# Altium PCB PCB1.PcbDoc
Units mm, origin at the board's own origin, x right, y up, seen from the top; angles counter-clockwise.
Board outline 152.4 x 101.6 mm, 2 copper layers (Top Layer, Bottom Layer); 68 components, 41 nets, 225 pads, 440 vias.
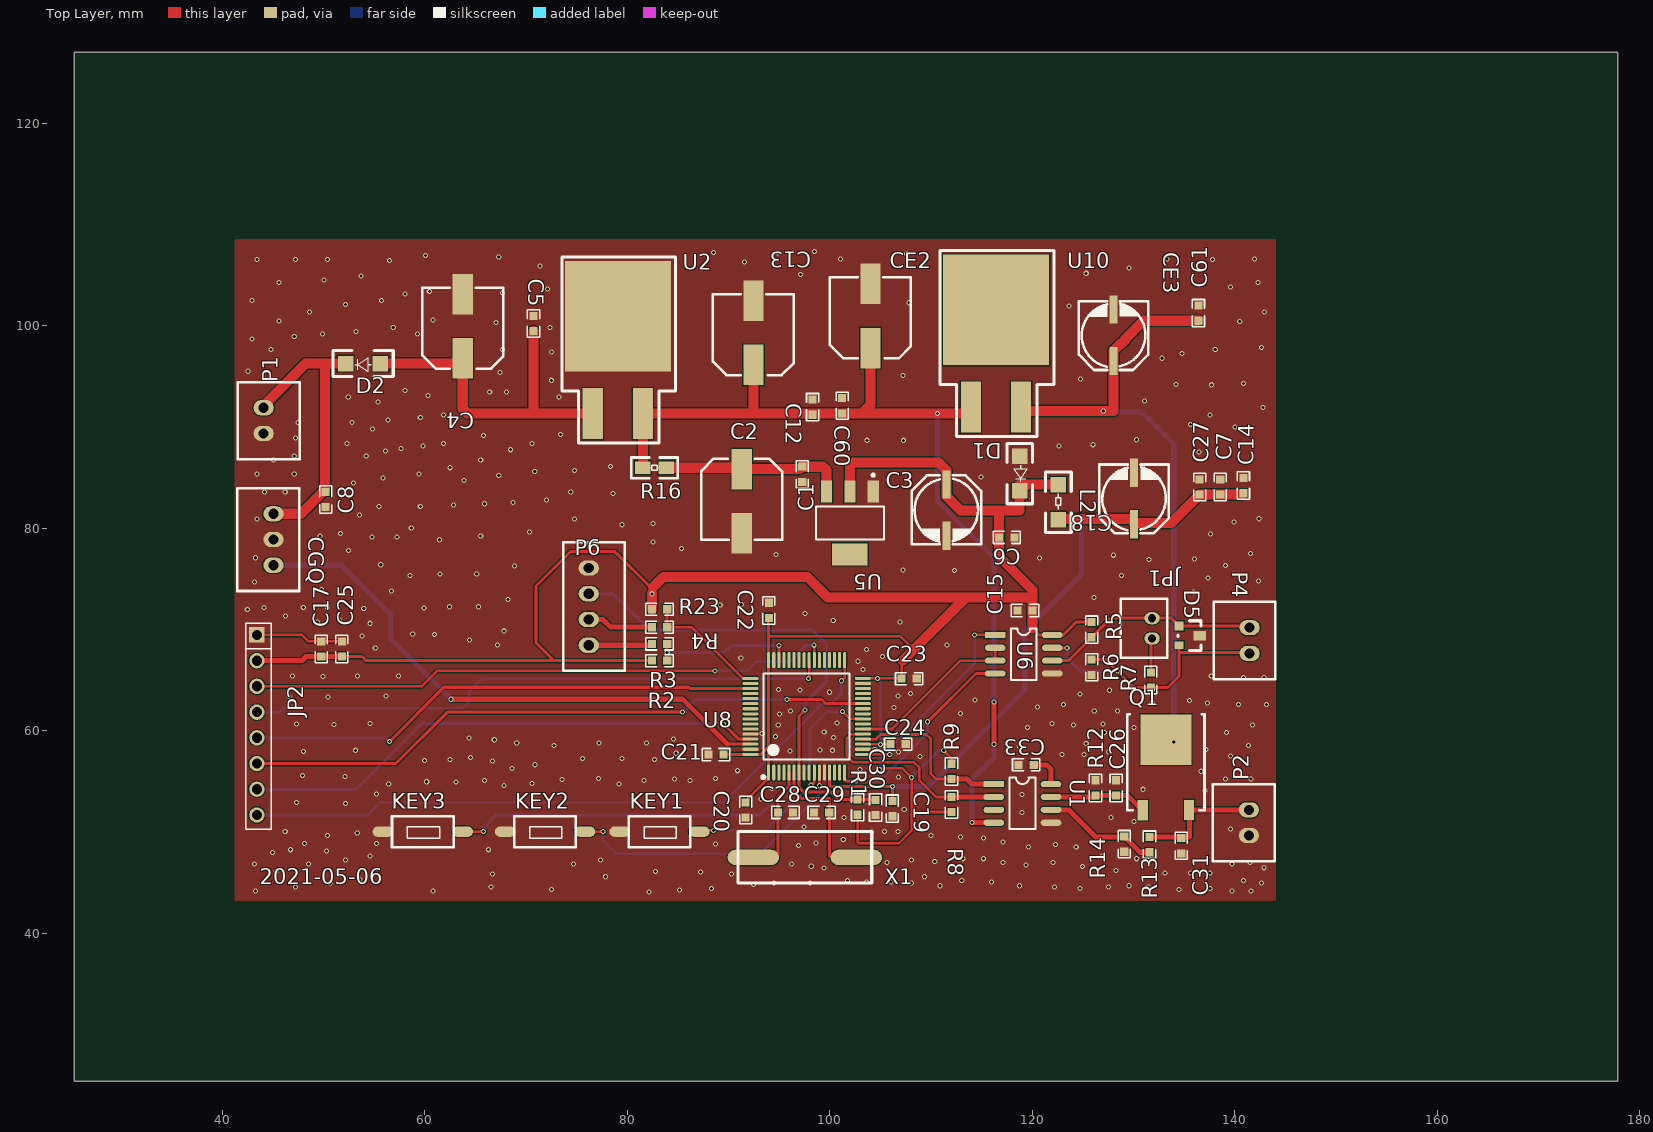
[diagram p0: Top Layer view]
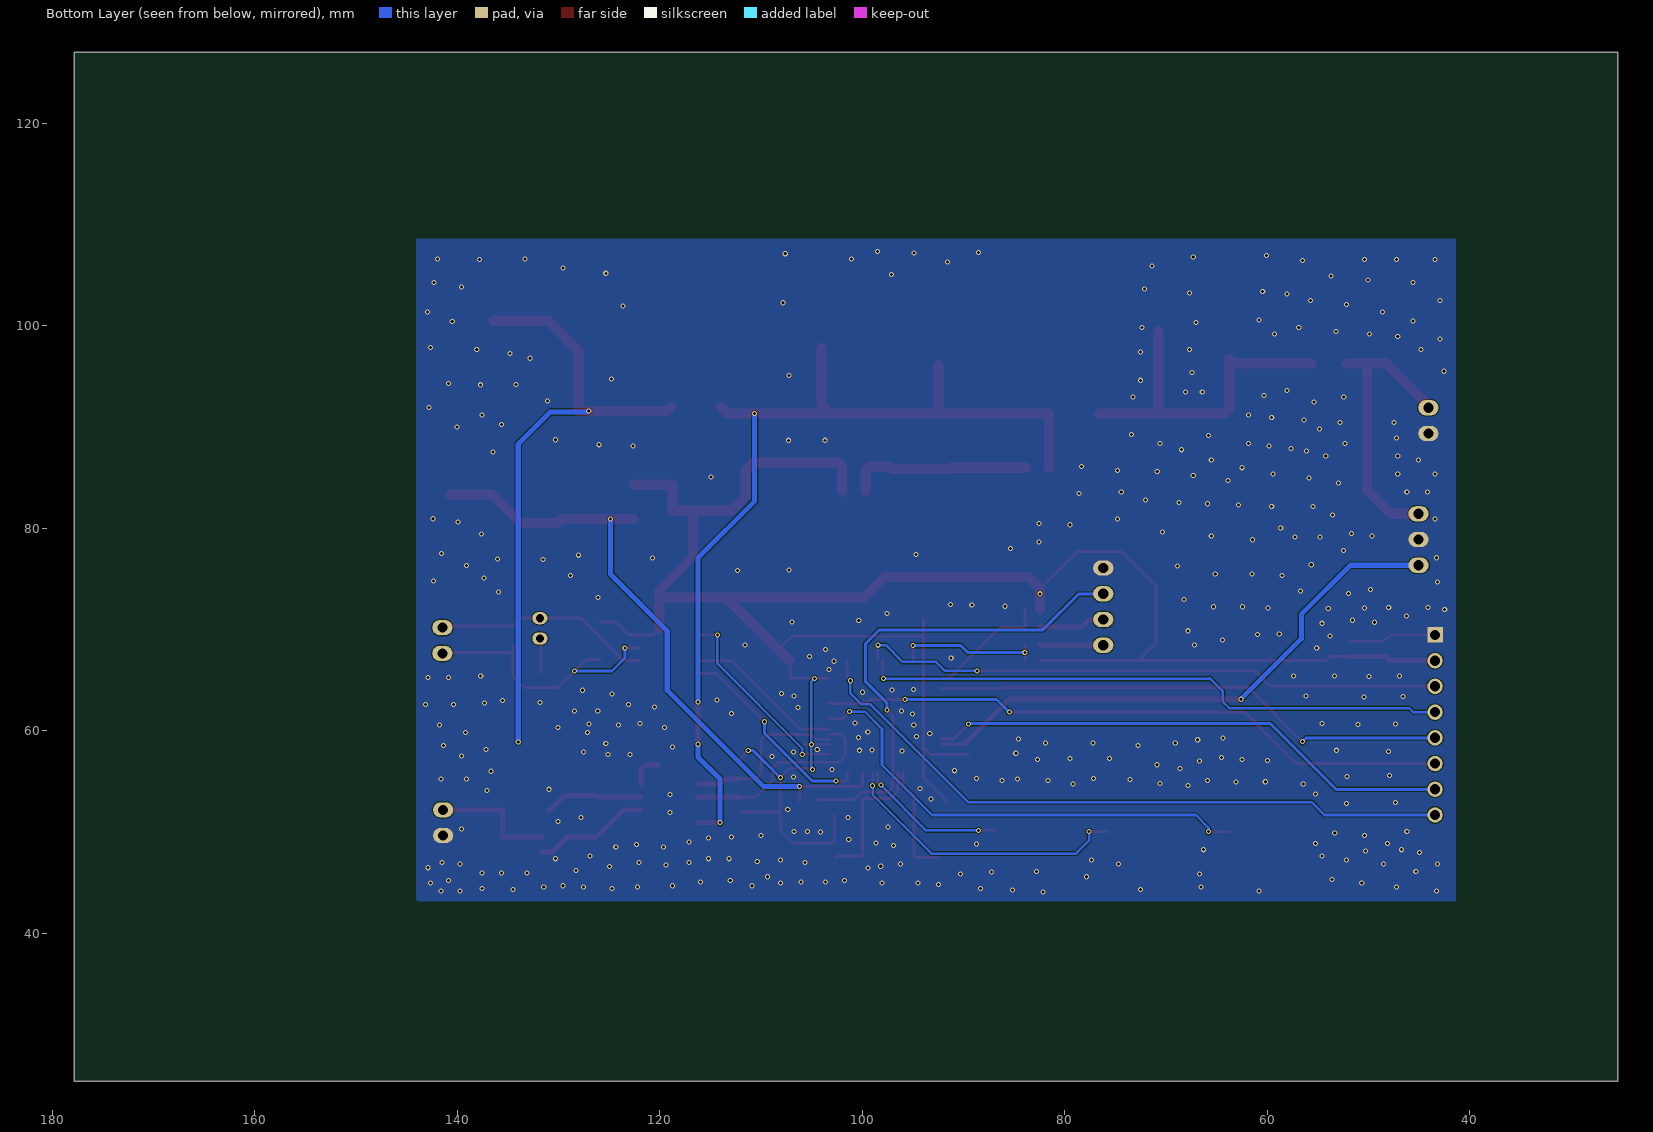
[diagram p1: Bottom Layer view, seen from below]

## Layer stack, top to bottom
Top Solder: solder mask 0.0102, Solder Resist, Dk 3.5
Top Layer: signal copper 0.0356
Dielectric 1: dielectric 0.32, FR-4, Dk 4.8
Bottom Layer: signal copper 0.0356
Bottom Solder: solder mask 0.0102, Solder Resist, Dk 3.5

## Board outline
25.4,25.4 177.8,25.4 177.8,127 25.4,127

## Design rules (kind name [scope] priority, off if disabled: settings)
Clearance [All] p1: gap=0.1
PolygonConnect [All] p1: connectstyle=Direct reliefconductorwidth=0.254 reliefentries=4 polygonreliefangle="90 Angle" airgapwidth=0.254
RoutingVias [All] p1: holewidth=0.711 width=1.27 viastyle="Through Hole" minholewidth=0.711 minwidth=1.27 maxholewidth=0.711 maxwidth=1.27
SolderMaskExpansion [All] p1: expansion=0.102
UnpouredPolygon [All] p1: allowunpoured=FALSE
Width [All] p1: maxlimit=3 minlimit=0.254 preferedwidth=0.3 minimp=50.000000 maximp=50.000000 favimp=50.000000
29 further rules are at their usual default settings.

## Components (designator, comment, footprint, x,y, rotation, side; value= is the part's Value field where it differs from the comment)
C1 "104" 0603C#1 97.282,84.582 r90 top
C2 "CAP1" C-0808-S 91.313,85.852 r90 top
C3 "CAP1" CAP-D6.3*H5.5 111.506,81.788 r90 top
C4 "CAP1" C-0808-S 63.754,96.774 r270 top
C5 "104" 0603C#1 70.739,100.965 r270 top
C6 "104" 0603C#1 118.22,79.1 r180 top
C7 "104" 0603C#1 138.557,84.836 r270 top
C8 "0.1u" 0603C#1 50.22,82.09 r90 top
C12 "104" 0603C#1 98.298,92.71 r270 top
C13 "CAP1" C-0808-S 92.456,96.139 r270 top
C14 "104" 0603C#1 140.843,84.963 r270 top
C15 "0.1u" 0603C#1 120.015,71.882 r180 top
C17 "104" 0603C#1 49.784,68.834 r270 top
C18 "CAP1" CAP-D6.3*H5.5 130.048,82.931 r270 top
C19 "104" 0603C#1 106.172,51.562 r90 top
C20 "104" 0603C#1 91.694,51.435 r90 top
C21 "104" 0603C#1 88.011,57.658 r0 top
C22 "104" 0603C#1 93.98,72.644 r270 top
C23 "104" 0603C#1 108.585,65.151 r180 top
C24 "104" 0603C#1 107.5,58.68 r180 top
C25 "10u" 0603C#1 51.816,68.834 r270 top
C26 "1u" 0603C#1 128.27,55.118 r270 top
C27 "104" 0603C#1 136.525,84.836 r270 top
C28 "22p" 0603C#1 94.869,51.943 r0 top
C29 "22p" 0603C#1 99.949,51.943 r180 top
C30 "0.1u" 0603C#1 104.521,51.689 r90 top
C31 "10u" 0603C#1 134.7,47.9 r90 top
C33 "1u" 0603C#1 120.142,56.642 r180 top
C60 "Cap S1" 0603C#2 101.219,92.837 r270 top
C61 "Cap S1" 0603C#2 136.398,101.981 r270 top
CE2 "CAP1" C-0808-S 104.013,97.79 r270 top
CE3 "CAP1" CAP-D6.3*H5.5 128.016,99.06 r270 top
CGQ "MHDR1X3" CON-3-2.5 45.06,81.43 r270 top
D1 "SMBJ5.0CA_C143171" 1206D-N 118.75,87.12 r270 top
D2 "M7" 1206D-N 55.626,96.266 r180 top
D5 "BAT54C" SOT-23A 134.493,70.358 r270 top
JP1 "JUMPER" CON-2-2.0 131.826,71.12 r270 top
JP2 "显示接口" CON-8-2.5-1 43.434,69.469 r0 top
KEY1 "+" SW/2/SMT 83.312,49.911 r180 top
KEY2 "功能选择" SW/2/SMT 72.009,49.911 r180 top
KEY3 "-" SW/2/SMT 59.944,49.911 r180 top
L2 "100uH" 1206R-1 122.57,84.29 r270 top
P1 "+24V" CON-2-2.5 44.1,89.36 r90 top
P2 "电磁线圈10R" CON-2-2.5 141.38,52.197 r270 top
P4 "RS485" CON-2-2.5 141.46,70.19 r270 top
P6 "Down" CON-4-2.5 76.2,68.453 r90 top
Q1 "2SD882" TO_252 133.07,52.15 r0 top
R1 "10k" 0603R 102.743,53.213 r270 top
R2 "10K" 0603R 83.947,66.929 r180 top
R3 "100R" 0603R 83.947,68.58 r180 top
R4 "100R" 0603R 83.947,70.231 r180 top
R5 "4.7k" 0603R 125.857,70.739 r270 top
R6 "4.7k" 0603R 125.857,65.532 r90 top
R7 "120" 0603R 131.699,64.262 r90 top
R8 "10k" 0603R 112.014,53.467 r270 top
R9 "10k" 0603R 112.014,55.245 r90 top
R12 "100k" 0603R 126.238,55.118 r270 top
R13 "1k" 0603R 131.57,48.01 r90 top
R14 "1k" 0603R 129.08,48.06 r90 top
R16 "2K" 0805R-1 83.82,85.979 r180 top
R23 "10K" 0603R 83.947,72.009 r180 top
U1 "GP8202" SO-8N 116.205,54.737 r0 top
U2 "LM7812S/TR" TO-263-3 76.581,91.313 r0 top
U5 "LM1117_3.3" SOT223-117 101.981,80.518 r180 top
U6 "MAX485ESA+T" SO-8N 116.332,69.469 r0 top
U8 "STM32F103RBT6" STM32F103RBT6 93.98,55.88 r0 top
U10 "LM7806-263" TO-263-3 113.919,91.948 r0 top
X1 "12MHz" SMD 102.616,47.498 r180 top

## Footprints (in the part's own frame and the unit in brackets; to place one, negate y for a bottom-side part, rotate by r counter-clockwise, add the part's x,y. Pads: shape width x height; smd on the part's side, far side on the other; paste and mask are expansions set on the pad)
0603C#1 [mm]
  rect 0.8x0.8 smd: 1(0,0) 2(1.5,0)
  silkscreen extent -0.6,-0.6 2.1,0.6
0603C#2 [mm]
  rect 0.8x0.8 smd: 1(-0.009,0.004) 2(1.491,0.004)
  silkscreen extent -0.61,-0.6 2.09,0.6
0603R [mm]
  rect 0.8x0.8 smd: 1(0,0) 2(1.5,0)
  silkscreen extent -0.6,-0.6 2.1,0.6
0805R-1 [mil]
  rect 60x50 smd: 1(-0.5,0.23) 2(89.5,0.23)
  silkscreen extent -46,-40 134,40
1206D-N [mil]
  rect 60x60 smd: 1(0,0) 2(135,0)
  silkscreen extent -50,-50 185,50
1206R-1 [mil]
  rect 60x60 smd: 1(0,0) 2(135,0)
  silkscreen extent -50,-50 185,50
C-0808-S [mm]
  rect 4x2 smd: 1(0,0) 2(-6.35,0)
  silkscreen extent -6.98,-4 1.02,4
CAP-D6.3*H5.5 [mm]
  rect 2.8x0.8 smd: 1(2.54,0) 2(-2.54,0)
  silkscreen extent -3.37,-3.43 3.43,3.43
CON-2-2.0 [mm]
  oval 1.2x1.5 hole 0.8: 1(0,0) 2(2,0)
  silkscreen extent -1.91,-3.1 3.9,1.5
CON-2-2.5 [mm]
  oval 1.5x2 hole 1: 1(0,0) 2(2.54,0)
  silkscreen extent -2.54,-3.56 5.08,2.54
CON-3-2.5 [mm]
  oval 1.5x2 hole 1: 1(0,0) 2(2.54,0) 3(5.08,0)
  silkscreen extent -2.54,-3.56 7.62,2.54
CON-4-2.5 [mm]
  oval 1.5x2 hole 1: 1(0,0) 2(2.54,0) 3(5.08,0) 4(7.62,0)
  silkscreen extent -2.54,-3.56 10.16,2.54
CON-8-2.5-1 [mil]
  rect 60x60 hole 40: 1(0,0)
  round 60 hole 40: 2(0,-100) 3(0,-200) 4(0,-300) 5(0,-400) 6(0,-500) 7(0,-600) 8(0,-700)
  silkscreen extent -44,-755 55,45
SMD [mil]
  oval 200x60 smd: 1(0,0) 2(400,0)
  silkscreen extent -60,-101 459,99
SO-8N [mil]
  rect 80x24 smd: 1(0,0)
  oval 80x24 smd: 2(0,-50) 3(0,-100) 4(0,-150) 5(221.9,-150) 6(221.9,-100) 7(221.9,-50) 8(221.9,0)
  silkscreen extent 61,-175 161,25
SOT223-117 [mm]
  rect 3.5x2.15 smd: 0(-0.005,3.095)
  rect 1.1x2.15 smd: 1(-2.305,-3.105) 2(-0.005,-3.105) 3(2.295,-3.105)
  silkscreen extent -3.36,-4.85 3.34,1.62
SOT-23A [mil]
  rect 36x36 smd: 1(0,0)
  rect 30x36 smd: 2(75,0)
  rect 36x50 smd: 3(38,80)
  silkscreen extent -20,-5 95,85
STM32F103RBT6 [mm]
  oval 0.3x1.6 smd: 1(-0.013,0.001) 2(0.487,0.001) 3(0.987,0.001) 4(1.487,0.001) 5(1.987,0.001) 6(2.487,0.001) 7(2.987,0.001) 8(3.487,0.001) 9(3.987,0.001) 10(4.487,0.001) 11(4.987,0.001) 12(5.487,0.001) 13(5.987,0.001) 14(6.487,0.001) 15(6.987,0.001) 16(7.487,0.001) 33(7.487,11.101) 34(6.987,11.101) 35(6.487,11.101) 36(5.987,11.101) 37(5.487,11.101) 38(4.987,11.101) 39(4.487,11.101) 40(3.987,11.101) 41(3.487,11.101) 42(2.987,11.101) 43(2.487,11.101) 44(1.987,11.101) 45(1.487,11.101) 46(0.987,11.101) 47(0.487,11.101) 48(-0.013,11.101)
  oval 1.6x0.3 smd: 17(9.287,1.801) 18(9.287,2.301) 19(9.287,2.801) 20(9.287,3.301) 21(9.287,3.801) 22(9.287,4.301) 23(9.287,4.801) 24(9.287,5.301) 25(9.287,5.801) 26(9.287,6.301) 27(9.287,6.801) 28(9.287,7.301) 29(9.287,7.801) 30(9.287,8.301) 31(9.287,8.801) 32(9.287,9.301) 49(-1.813,9.301) 50(-1.813,8.801) 51(-1.813,8.301) 52(-1.813,7.801) 53(-1.813,7.301) 54(-1.813,6.801) 55(-1.813,6.301) 56(-1.813,5.801) 57(-1.813,5.301) 58(-1.813,4.801) 59(-1.813,4.301) 60(-1.813,3.801) 61(-1.813,3.301) 62(-1.813,2.801) 63(-1.813,2.301) 64(-1.813,1.801)
  silkscreen extent -0.69,-0.61 7.99,9.8
SW/2/SMT [mil]
  oval 80x40 smd: 1(160,-5) 2(-150,-5)
  silkscreen extent -115,-65 125,55
TO-263-3 [mil]
  rect 78x198 smd: 1(0.39,0.39) 2(195.39,0.39)
  rect 412x430 smd: 3(98.39,378.39)
  silkscreen extent -119,-113 323,610
TO_252 [mm]
  rect 1x2 smd: 1(-2.164,0.002) 3(2.409,0.021)
  rect 5x5 smd: 2(0.123,6.981)
  silkscreen extent -3.69,0 3.93,9.5

## Part data
C2 C3 C4 C13 C18 CE2 CE3: "10uF/16V"
C60 C61: "1nF"
R16: library part 10k
U2 U10: library part LM7805-263
U5: "稳压"

## Via types
v1: diameter 0.5, hole 0.3, Top Layer to Bottom Layer, 440 vias

## Nets (pads, with @x,y where several pads share a name; then routed paths per layer and width w, separated by ;. In a path a pad name is that pad's centre, name@x,y a point inside that pad or via, vN(x,y) a via of type N, cw(c..) or ccw(c..) an arc to the next point about the centre after c; other vN are vias at no path point)
"1-5V S": CGQ.3 U8.62 | length 55.8
  Top Layer w0.3: 89.909,58.681 U8.62
  Top Layer w0.5: v1(62.611,63.119) 85.471,63.119 89.909,58.681
  Bottom Layer w0.5: CGQ.3 51.793,76.35 56.642,71.501 56.642,69.088 v1(62.611,63.119)
+3.2V: C7.2 C14.2 C18.1 C19.2 C27.2 L2.2 U8.13 | length 64.1
  Top Layer w0.3: U8.13 99.967,54.623 100.107,54.483 v1(106.172,54.483) C19.2
  Top Layer w1: L2.2@122.57,80.899 v1(124.841,80.899) C18.1@129.667,80.899 ; C18.1@130.048,80.518 133.707,80.518 C27.2 C7.2 C14.2@140.716,83.336
  Bottom Layer w0.5: v1(106.172,54.483) 109.728,54.483 119.253,64.008 119.253,69.85 124.841,75.438 v1(124.841,80.899)
+3.3V: C3.1 C6.2 C15.1 C17.2 C20.2 C21.2 C22.2 C23.2 C24.2 C25.2 D1.2 JP2.2 L2.1 R1.2 R2.2 R5.1 R8.2 R9.2 R23.2 U5.2 U6.8 U8.1 U8.19 U8.32 U8.48 U8.64 | length 243.5
  Top Layer w0.254: C20.2 91.694,53.054 93.967,55.327 U8.1 ; 93.967,69.342 106.934,69.342 108.267,68.008 ; R1.2 102.743,49.022 102.87,48.895 106.807,48.895 108.077,50.165 v1(108.077,55.372) 107.132,56.317 104.92,56.317 v1(104.92,56.2) ; U8.19 C24.2@105.76,58.681 ; U8.32 107.055,65.181 C23.2 107.085,66.826 107.188,66.929
  Top Layer w0.3: C25.2 53.824,67.334 54.229,66.929 72.771,66.929 ; R2.2 72.771,66.929 ; v1(82.447,73.533) 82.447,74.017 78.774,77.69 74.388,77.69 70.993,74.295 70.993,68.707 72.771,66.929 ; C21.2 89.534,57.681 U8.64 93.201,57.681 93.967,58.447 ; U8.1 93.967,58.447 ; C22.2@93.967,71.03 93.967,69.342 U8.48 93.967,58.88 93.967,58.447 ; 108.101,51.967 R8.2 ; v1(111.252,58.039) 112.014,57.277 R9.2 ; 120.015,70.104 120.65,69.469 U6.8 123.063,69.469 124.333,70.739 R5.1
  Top Layer w0.5: JP2.2 47.879,66.929 48.284,67.334 C17.2 C25.2
  Top Layer w1: R23.2 v1(82.447,73.533) ; 82.55,74.168 83.566,75.184 97.79,75.184 99.822,73.152 113.411,73.152 ; U5.2 101.986,86.111 102.362,86.487 110.744,86.487 111.506,85.725 111.506,83.185 112.927,81.764 116.713,81.764 ; 107.188,66.929 108.267,68.008 113.411,73.152 ; D1.2@118.745,84.328 118.745,81.764 116.713,81.764 ; D1.2@118.75,84.323 L2.1@122.57,84.323 ; 120.015,70.104 C15.1 120.015,73.152 ; 113.411,73.152 120.015,73.152 ; 116.713,81.764 116.713,77.216 120.015,73.914 120.015,73.152
  Bottom Layer w0.254: v1(104.72,65.15) 105.04,64.83 105.04,56.32 v1(104.92,56.2)
  Bottom Layer w0.3: v1(108.077,55.372) 110.744,58.039 v1(111.252,58.039)
  other v1: 105.02,58.67
+6V: C61.2 CE3.1 Q1.2 U10.2 | length 62.7
  Top Layer w0.3: v1(133.961,58.904) Q1.2@133.985,58.928
  Top Layer w1: U10.2 119.273,91.567 v1(127,91.567) 128.016,91.567 128.016,97.536 128.683,98.203 128.792,98.203 129.143,98.554 129.143,98.663 130.97,100.49 C61.2
  Bottom Layer w0.5: v1(127,91.567) 127.092,91.475 130.81,91.475 133.961,88.324 v1(133.961,58.904)
+12V: C12.2 C13.1 C60.2 CE2.1 R16.2 U1.4 U2.2 U10.1 | length 95.1
  Top Layer w0.5: v1(114.046,50.927) U1.4 ; v1(116.205,58.674) v1(116.205,62.865)
  Top Layer w1: R16.2@81.544,85.976 U2.2 103.134,91.323 ; 92.456,91.577 C13.1 ; CE2.1 104.013,92.202 103.134,91.323 ; U10.1 113.294,91.323 103.134,91.323
  Bottom Layer w0.5: v1(110.617,91.313) 110.617,82.677 116.205,77.089 v1(116.205,62.865) ; v1(114.046,50.927) 114.046,55.245 116.205,57.404 v1(116.205,58.674)
+24V: C8.2 CGQ.1 D2.2 P1.2 | length 28.9
  Top Layer w1: P1.2@43.688,91.694 48.26,96.266 50.165,96.266 ; CGQ.1 47.775,81.43 48.692,82.347 50.165,83.82 50.165,96.266 ; D2.2 50.165,96.266
BL: JP2.8 U8.33 | length 66.1
  Top Layer w0.254: v1(101.171,64.945) 101.467,65.241 U8.33
  Bottom Layer w0.254: JP2.8 54.356,51.689 55.626,52.959 89.535,52.959 99.187,62.611 100.076,62.611 101.171,63.706 v1(101.171,64.945)
CS: JP2.7 U8.61 | length 52.1
  Top Layer w0.3: v1(89.51,60.67) 90.999,59.181 U8.61
  Bottom Layer w0.3: JP2.7 53.213,54.229 59.69,60.706 89.514,60.706 v1@89.58,60.64
DO: JP2.6 U8.27 | length 62.6
  Top Layer w0.3: JP2.6 57.15,56.769 62.23,61.849 v1(85.471,61.849) ; v1(95.774,63.103) 99.197,63.103 99.619,62.681 U8.27
  Bottom Layer w0.3: v1(85.471,61.849) 86.725,63.103 v1(95.774,63.103)
GND: C1.1 C2.2 C3.2 C4.2 C5.1 C6.1 C7.1 C8.1 C12.1 C13.2 C14.1 C15.2 C17.1 C18.2 C19.1 C20.1 C21.1 C22.1 C23.1 C24.1 C25.1 C26.1 C27.1 C28.2 C29.2 C30.1 C31.1 C33.2 C60.1 C61.1 CE2.2 CE3.2 CGQ.2 D1.1 D5.3 JP2.1 KEY1.1 KEY2.1 KEY3.1 P1.1 P2.2 P6.4 R6.1 R12.1 R14.1 U1.5 U2.3 U5.1 U6.5 U8.12 U8.18 U8.31 U8.47 U8.60 U8.63 | length 8.6
  Top Layer w0.254: JP2.1 47.879,69.469 48.514,68.834 C17.1 C25.1
  other v1: 82.169,44.069 43.307,44.196 60.833,44.196 139.7,44.196 141.605,44.196 85.15,44.3 72.517,44.323 134.493,44.323 88.31,44.42 124.714,44.45 137.541,44.45 47.244,44.577 66.548,44.577 122.174,44.577 127.508,44.577 131.445,44.577 110.871,44.704 118.745,44.704 129.54,44.704 92.456,44.831 50.673,44.958 94.488,44.958 98.044,44.958 108.077,44.958 142.621,44.958 103.632,45.085 106.045,45.085 115.951,45.085 101.727,45.212 113.03,45.212 140.843,45.212 53.594,45.339 77.851,45.593 109.347,45.593 66.675,45.847 90.297,45.847 133.096,45.974 135.636,45.974 137.541,45.974 87.23,46.08 45.339,46.101 82.804,46.101 128.27,46.228 99.42,46.44 142.875,46.482 124.968,46.609 98.17,46.63 119.38,46.736 96.24,46.85 43.18,46.863 48.514,46.863 74.676,46.863 139.7,46.863 105.664,46.99 117.094,46.99 122.047,46.99 141.478,46.99 110.363,47.117 52.197,47.244 77.343,47.244 108.077,47.244 113.157,47.371 115.189,47.371 130.302,47.371 54.61,47.625 126.873,47.625 44.958,48.006 50.292,48.133 46.736,48.26 66.294,48.26 119.634,48.514 124.333,48.514 96.93,48.67 122.301,48.768 88.73,48.81 48.133,48.895 55.245,48.895 98.62,48.94 117.094,49.022 101.33,49.26 115.189,49.403 112.903,49.53 50.419,49.657 109.982,49.657 53.34,49.911 104.1,50 46.228,50.038 105.41,50.05 106.72,50.05 139.573,50.292 97.46,50.49 130.048,51.054 127.762,51.435 101.4,51.46 118.999,51.943 107.35,52.22 52.18,52.81 47.34,52.91 93.21,53.25 118.999,53.721 55.24,53.76 137.033,54.102 130.937,54.229 94.3,54.31 67.81,54.61 56.45,54.74 79.19,54.74 70.6,54.79 60.2,54.97 63.09,54.96 65.89,55.08 81.65,55.08 86.18,55.08 73.57,55.19 84.65,55.24 139.065,55.245 141.605,55.245 88.7,55.28 77.16,55.3 106.79,55.42 52.14,55.48 47.93,55.59 136.652,56.007 90.89,56.06 102.97,56.17 68.64,56.29 70.87,56.65 66.675,57.023 60,57.08 62.484,57.15 82.677,57.15 75.565,57.277 79.502,57.277 64.53,57.36 108.9,57.46 139.573,57.531 122.936,57.658 125.095,57.658 84.836,57.785 127.508,57.912 106.8,57.93 48.02,57.98 96.08,57.99 53.16,58.08 100.25,58.08 99.03,58.11 104.44,58.17 137.16,58.166 118.745,58.42 72.771,58.547 141.351,58.547 125.32,58.74 69.088,58.801 77.216,58.801 81.915,58.801 66.87,59.12 84.582,59.182 64.389,59.309 100.38,59.32 94.66,59.42 93.33,59.72 127.127,59.817 139.192,59.817 99.45,59.9 119.507,60.325 130.048,60.325 94.91,60.57 124.079,60.579 141.732,60.579 51.05,60.64 47.35,60.66 126.97,60.67 121.92,60.706 54.58,60.72 100.69,60.78 95.04,61.67 112.92,61.72 96.13,61.97 126.111,61.976 128.397,61.976 106.32,62.29 120.523,62.357 123.063,62.611 140.335,62.611 143.129,62.611 137.287,62.738 131.81,62.79 135.509,62.992 114.34,63.04 50.44,63.36 46.62,63.41 56.19,63.43 106.75,63.46 124.714,63.627 107.98,63.7 99.96,63.81 127.635,64.008 97.05,64.05 94.94,64.1 140.843,65.278 142.875,65.278 49.95,65.36 46.94,65.41 53.35,65.41 137.668,65.405 57.43,65.43 103.27,66.04 102.79,66.87 91.21,67.18 105.2,67.36 103.61,68.05 55.12,68.16 67.2,68.49 111.56,68.49 64.42,68.95 53.8,69.35 60.98,69.52 58.82,69.56 67.82,69.88 54.62,70.62 49.41,70.72 106.95,70.75 51.59,70.92 100.34,70.91 46.25,71.35 97.54,71.58 42.48,71.99 53.98,72.08 50.39,72.13 59.95,72.14 48.01,72.17 44.12,72.19 62.47,72.25 65.3,72.25 85.88,72.3 89.18,72.43 91.26,72.48 68.23,72.97 126.07,73.15 51.97,73.56 135.92,73.71 56.72,73.79 49.81,73.97 43.18,74.676 142.33,74.79 137.36,75.08 58.56,75.33 128.8,75.33 61.49,75.49 65.14,75.49 112.31,75.85 107.21,75.9 68.85,76.26 139.06,76.31 55.66,76.4 131.52,76.93 136,76.95 120.69,77.06 43.307,77.089 128,77.34 94.68,77.39 141.53,77.52 52.49,77.8 85.37,78.01 82.56,78.63 61.468,78.867 54.78,79.13 57.277,79.121 49.68,79.22 65.532,79.248 137.6,79.45 51.7,79.48 70.358,79.629 58.674,80.01 79.5,80.35 82.56,80.48 139.91,80.63 43.434,80.899 74.803,80.899 142.36,80.94 53.57,81.3 55.499,82.169 59.563,82.169 62.865,82.296 65.913,82.423 68.707,82.55 72.009,82.804 78.613,83.439 44.196,83.566 46.228,83.566 74.422,83.566 52.959,84.455 63.881,84.709 55.88,84.963 114.93,85.06 67.31,85.217 43.434,85.344 47.117,85.344 59.436,85.344 70.866,85.598 74.803,85.725 62.484,85.979 78.359,86.106 45.085,86.741 65.532,86.741 47.117,87.122 54.229,87.122 136.46,87.53 56.134,87.63 68.453,87.757 57.658,87.884 122.62,88.12 59.817,88.138 125.97,88.25 52.324,88.392 61.849,88.392 70.612,88.392 103.69,88.69 107.29,88.69 130.29,88.74 47.244,88.9 65.786,89.154 73.406,89.281 54.864,89.789 139.99,90.02 135.62,90.26 47.498,90.424 52.832,90.424 56.388,90.678 59.563,90.932 61.849,91.186 137.55,91.18 142.77,91.93 55.372,92.456 131.064,92.564 52.451,92.964 73.279,92.964 60.325,93.091 66.421,93.472 68.072,93.472 58.039,93.599 137.7,94.17 134.2,94.19 140.84,94.3 72.517,94.615 124.76,94.73 107.24,95.07 67.437,95.377 42.545,95.504 132.81,96.79 134.77,97.25 72.517,97.409 138.06,97.64 44.831,97.663 67.691,97.663 142.61,97.87 42.926,98.679 47.117,98.933 49.911,99.187 59.309,99.187 53.213,99.441 56.896,99.822 72.39,99.822 67.056,100.33 140.48,100.42 45.593,100.457 60.833,100.584 48.641,101.346 142.92,101.34 123.6,101.94 52.197,102.108 107.8,102.27 42.926,102.489 55.753,102.489 58.039,103.124 67.691,103.251 60.452,103.378 72.136,103.632 139.55,103.81 45.593,104.267 142.3,104.28 50.038,104.521 53.721,104.902 97.1,105.05 125.32,105.18 129.54,105.72 71.374,105.918 91.59,106.28 56.515,106.426 137.8,106.54 43.434,106.553 47.244,106.553 50.419,106.553 101.04,106.57 133.3,106.59 141.94,106.59 67.31,106.807 60.071,106.934 107.6,107.11 94.89,107.19 88.53,107.21 98.49,107.34
KEY1: KEY1.2 U8.10 | length 14.6
  Top Layer w0.254: KEY1.2@86.868,50.038 86.995,50.165 v1(88.519,50.165) ; v1(98.15,54.63) 98.467,54.947 U8.10
  Bottom Layer w0.254: v1(88.519,50.165) 93.685,50.165 v1(98.15,54.63)
KEY2: KEY2.2 U8.11 | length 29.3
  Top Layer w0.254: KEY2.2 v1(77.597,50.038) v1@77.751,50.038 ; v1(98.967,54.577) U8.11
  Bottom Layer w0.254: v1(77.597,50.038) 77.597,49.149 78.867,47.879 93.159,47.879 98.967,53.687 v1(98.967,54.577)
KEY3: KEY3.2 U8.24 | length 47
  Top Layer w0.254: KEY3.2 v1(65.786,50.038) ; v1(101.273,61.903) 101.995,61.181 U8.24
  Bottom Layer w0.254: v1(65.786,50.038) 65.786,50.419 67.056,51.689 93.091,51.689 98.044,56.642 98.044,60.198 99.749,61.903 v1(101.273,61.903)
NetC1_2: C1.2 C2.1 R16.1 U5.3 | length 17.8
  Top Layer w1: R16.1 C2.1@91.192,85.973 ; C2.1 C1.2@97.052,85.852 ; C1.2 99.338,86.082 99.686,85.734 U5.3
NetC4_1: C4.1 C5.2 D2.1 U2.1 | length 34.5
  Top Layer w1: D2.1 63.246,96.266 C4.1 63.754,91.821 64.252,91.323 70.866,91.323 ; C5.2 70.739,91.45 70.866,91.323 ; U2.1 70.866,91.323
NetC26_2: C26.2 Q1.1 R12.2 U1.7 | length 9.7
  Top Layer w0.5: U1.7 R12.2@126.238,53.467 ; R12.2 C26.2 128.294,53.594 129.413,53.594 130.81,52.197 Q1.1@130.906,52.197
NetC28_1: C28.1 U8.5 X1.2 | length 11.2
  Top Layer w0.3: X1.2 94.742,47.498 94.869,47.625 C28.1 94.869,53.467 95.967,54.565 U8.5
NetC29_1: C29.1 U8.6 X1.1 | length 14
  Top Layer w0.3: U8.6 96.467,54.049 97.176,53.34 99.949,53.34 C29.1 99.949,47.625 102.489,47.625 X1.1
NetC31_2: C31.2 P2.1 Q1.3 R13.2 | length 12.6
  Top Layer w0.5: R13.2 135.505,49.51 ; 135.509,49.506 135.509,52.149 135.461,52.197 137.541,52.197 P2.1
NetC33_1: C33.1 U1.8 | length 3.4
  Top Layer w0.5: C33.1 121.412,56.642 121.841,56.213 U1.8
NetD2_2: 
NetD5_1: D5.1 JP1.1 P4.1 R5.2 U6.6 | length 22.1
  Top Layer w0.3: U6.6 123.571,66.929 125.857,69.215 R5.2 127.738,71.12 JP1.1 133.731,71.12 D5.1 135.255,70.358 141.097,70.358 P4.1@141.732,69.723
NetD5_2: D5.2 P4.2 R6.2 R7.1 U6.7 | length 28.2
  Top Layer w0.3: U6.7 v1(123.444,68.199) ; R6.2 127.278,67.032 v1(128.397,65.913) 130.048,64.262 R7.1 133.34,64.262 134.493,65.415 134.493,67.72 ; D5.2 134.493,67.72 ; 135.657,67.72 134.493,67.72 ; 135.657,67.723 P4.2@141.46,67.723
  Bottom Layer w0.3: v1(123.444,68.199) 123.444,67.183 124.714,65.913 v1(128.397,65.913)
NetJP1_2: JP1.2 R7.2 | length 3.4
  Top Layer w0.3: R7.2 131.699,68.993 JP1.2
NetP6_1: P6.1 R3.2 | length 6.3
  Top Layer w0.5: P6.1 82.32,68.453 R3.2
NetP6_2: P6.2 R4.2 | length 6.6
  Top Layer w0.5: P6.2 76.74,70.993 76.747,71 77.59,71 78.359,70.231 R4.2
NetR13_1: R13.1 R14.2 U1.6 | length 11.5
  Top Layer w0.5: U1.6 123.571,52.197 126.262,49.506 R14.2@129.08,49.506 ; R14.2 130.63,48.01 R13.1
NRST: C30.2 P6.3 R1.1 U8.7 | length 49
  Top Layer w0.3: v1(97.571,62.068) 96.967,61.464 U8.7 96.967,54.417 97.409,53.975 100.076,53.975 100.838,53.213 R1.1 104.497,53.213 C30.2
  Bottom Layer w0.3: P6.3@76.2,73.21 76.49,73.5 78.646,73.5 82.169,69.977 98.298,69.977 99.695,68.58 99.695,64.897 97.571,62.773 v1(97.571,62.068)
PA2: U6.4 U8.16 | length 20.7
  Top Layer w0.3: U8.16 101.467,55.183 101.6,55.05 v1(102.58,55.05) ; v1(109.664,60.896) 114.427,65.659 U6.4
  Bottom Layer w0.3: v1(102.58,55.05) 104.93,55.05 109.664,59.784 v1(109.664,60.896)
PA3: U6.1 U8.17 | length 20
  Top Layer w0.254: U8.17 105.899,57.681 v1(105.92,57.66) ; v1(114.3,69.469) U6.1
  Bottom Layer w0.254: v1(105.92,57.66) 105.92,58.27 114.3,66.65 v1(114.3,69.469)
PA4: R9.1 U1.1 U8.20 | length 17.2
  Top Layer w0.254: U8.20 104.561,59.181 105.02,59.64 109.524,59.64 109.982,59.182 109.982,55.753 110.49,55.245 R9.1
  Top Layer w0.5: R9.1 113.538,55.245 114.046,54.737 U1.1
PA5: R8.1 U1.2 U8.21 | length 20.5
  Top Layer w0.254: U8.21 102.101,59.681 101.68,59.26 101.68,57.51 102.3,56.89 108.337,56.89 108.839,56.388 108.839,55.118 110.49,53.467 R8.1
  Top Layer w0.5: R8.1 U1.2
PA6: U6.2 U6.3 U8.22 | length 17.1
  Top Layer w0.254: U8.22 106.155,60.181 112.903,66.929 U6.3 U6.2
PA8: U8.41
PA9: U8.42
PA10: U8.43
PA13: R2.1 R3.1 U8.46 | length 14.4
  Top Layer w0.3: R2.1 v1(83.947,67.754) R3.1 ; U8.46 v1(94.967,68.424)
  Bottom Layer w0.3: v1(83.947,67.754) 89.535,67.713 89.557,67.713 90.268,68.424 v1(94.967,68.424)
PA14: R4.1 R23.1 U8.49 | length 12.1
  Top Layer w0.254: R4.1 86.36,70.231 91.41,65.181 U8.49
  Top Layer w0.3: R4.1 R23.1
RST: JP2.5 U8.51 | length 51.2
  Top Layer w0.3: v1(56.515,58.928) 61.89,64.303 86.065,64.303 86.187,64.181 U8.51
  Bottom Layer w0.3: JP2.5 56.134,59.309 v1(56.515,58.928)
SCL: JP2.3 U8.39 | length 58.2
  Top Layer w0.254: JP2.3 59.69,64.389 61.214,65.913 v1(88.646,65.913) ; v1(98.425,68.453) 98.467,68.411 U8.39
  Bottom Layer w0.254: v1(88.646,65.913) 91.821,65.913 92.71,66.802 96.012,66.802 97.663,68.453 v1(98.425,68.453)
SDA: JP2.4 U8.40 | length 58.3
  Top Layer w0.254: v1(97.917,65.151) 97.967,65.201 U8.40
  Bottom Layer w0.254: JP2.4 45.593,61.849 45.974,62.23 63.754,62.23 64.389,62.865 64.389,63.881 65.713,65.205 65.767,65.151 v1(97.917,65.151)
pads on no net: U1.3 U5.0 U8.2 U8.3 U8.4 U8.8 U8.9 U8.14 U8.15 U8.23 U8.25 U8.26 U8.28 U8.29 U8.30 U8.34 U8.35 U8.36 U8.37 U8.38 U8.44 U8.45 U8.50 U8.52 U8.53 U8.54 U8.55 U8.56 U8.57 U8.58 U8.59 U10.3

## Polygon pours and split planes (outlines as drawn)
GND on Bottom Layer "Bottom Layer-No Net" (solid, remove dead copper, pour order 4): 41.402,108.585 144.018,108.585 144.018,43.307 143.891,43.18 41.402,43.18 41.402,108.585
GND on Top Layer "Bottom Layer-No Net" (solid, remove dead copper, pour order 3): 41.32,108.52 144.03,108.52 144.03,43.17 143.98,43.22 41.22,43.22 41.22,108.47 41.32,108.57

## Silkscreen, mask and mechanical layers (free items; w line width, h text height)
Top Overlay:
  text "2021-05-06" at 43.688,44.831 h1.52
Mechanical 1:
  lines w0.1: 41.275,43.307 41.402,43.18 144.145,43.18 144.145,108.585 44.45,108.585 41.275,108.585 41.275,43.307